# Altium PCB RTL8199FTV.PcbDoc
Units mil, origin at the board's own origin, x right, y up, seen from the top; angles counter-clockwise.
Board outline 1380.35 x 675 mil, 4 copper layers (Top Layer, GND, PWR, Bottom Layer), stack 23.756 mil thick; 26 components, 15 nets, 98 pads, 28 vias.
Unrouted connection lines stored in the file: 23.
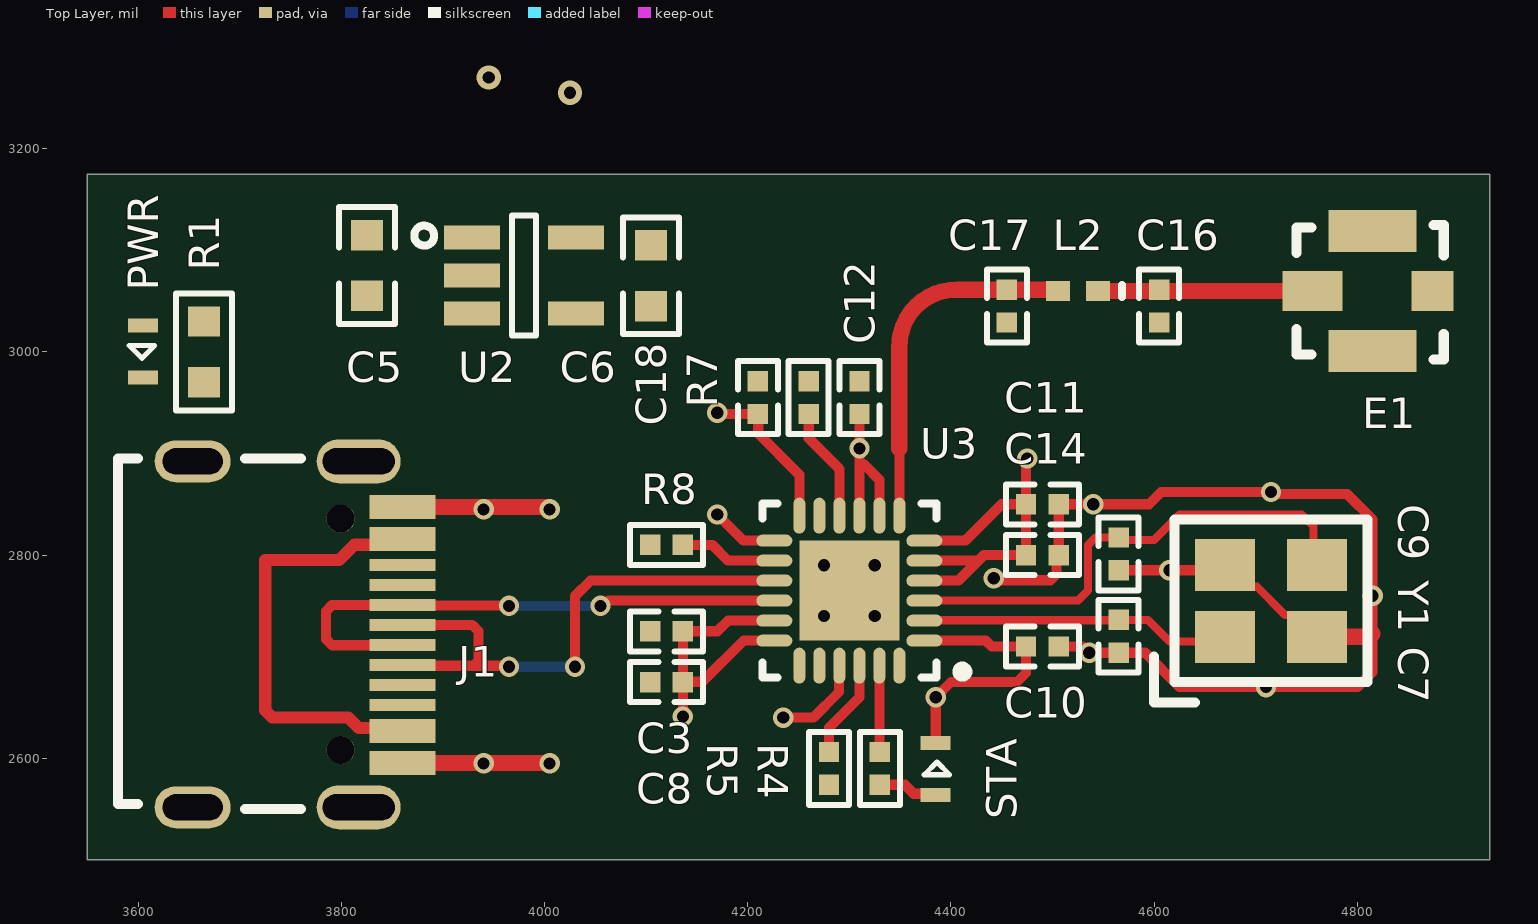
[diagram p0: Top Layer view]
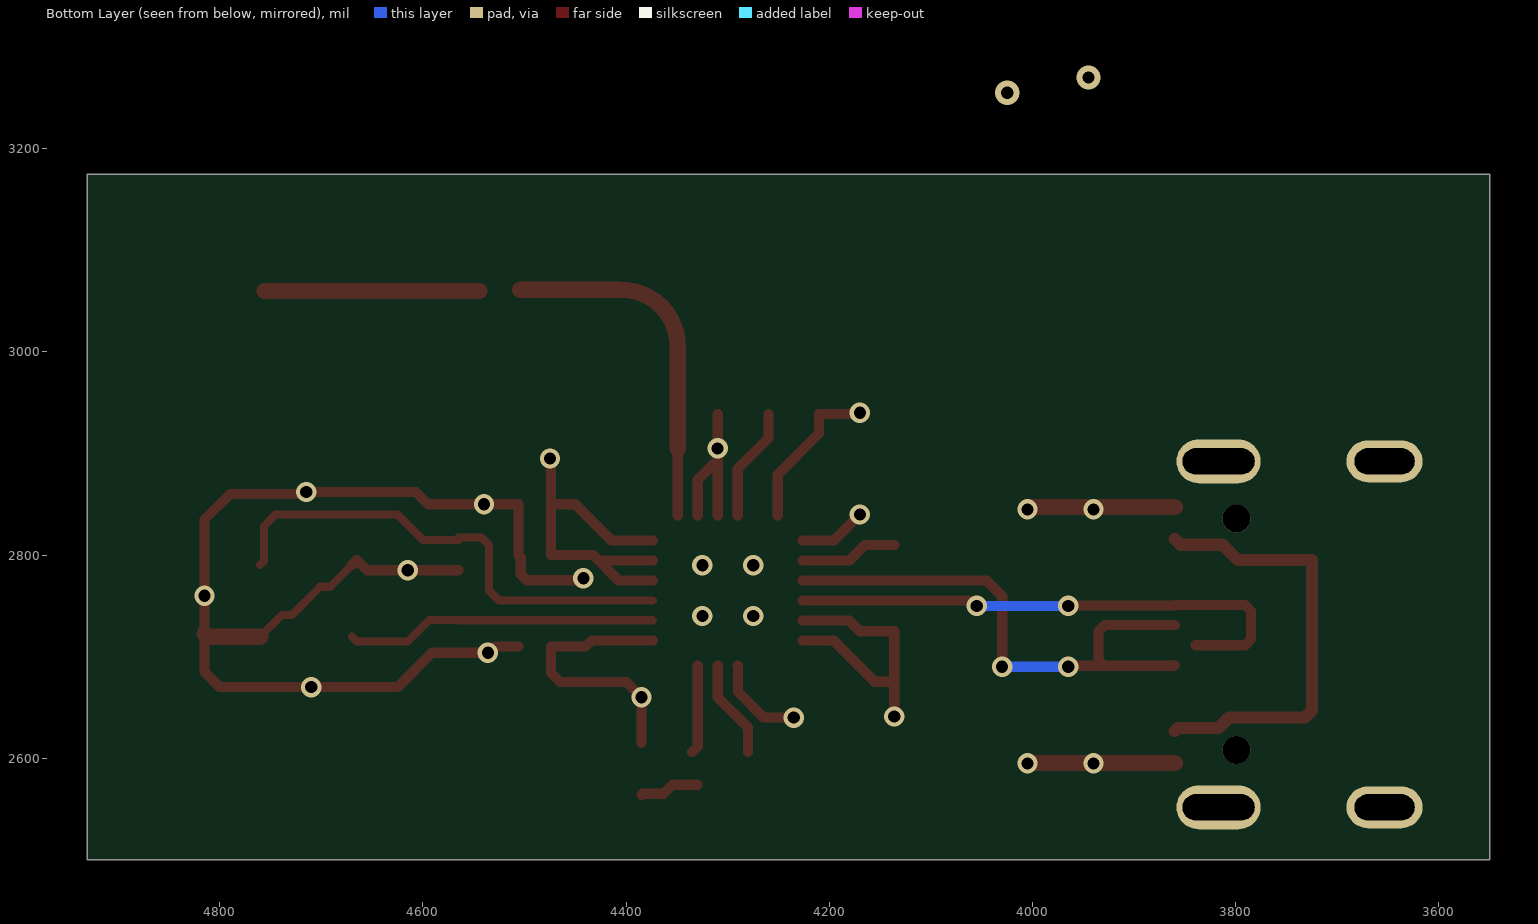
[diagram p1: Bottom Layer view, seen from below]
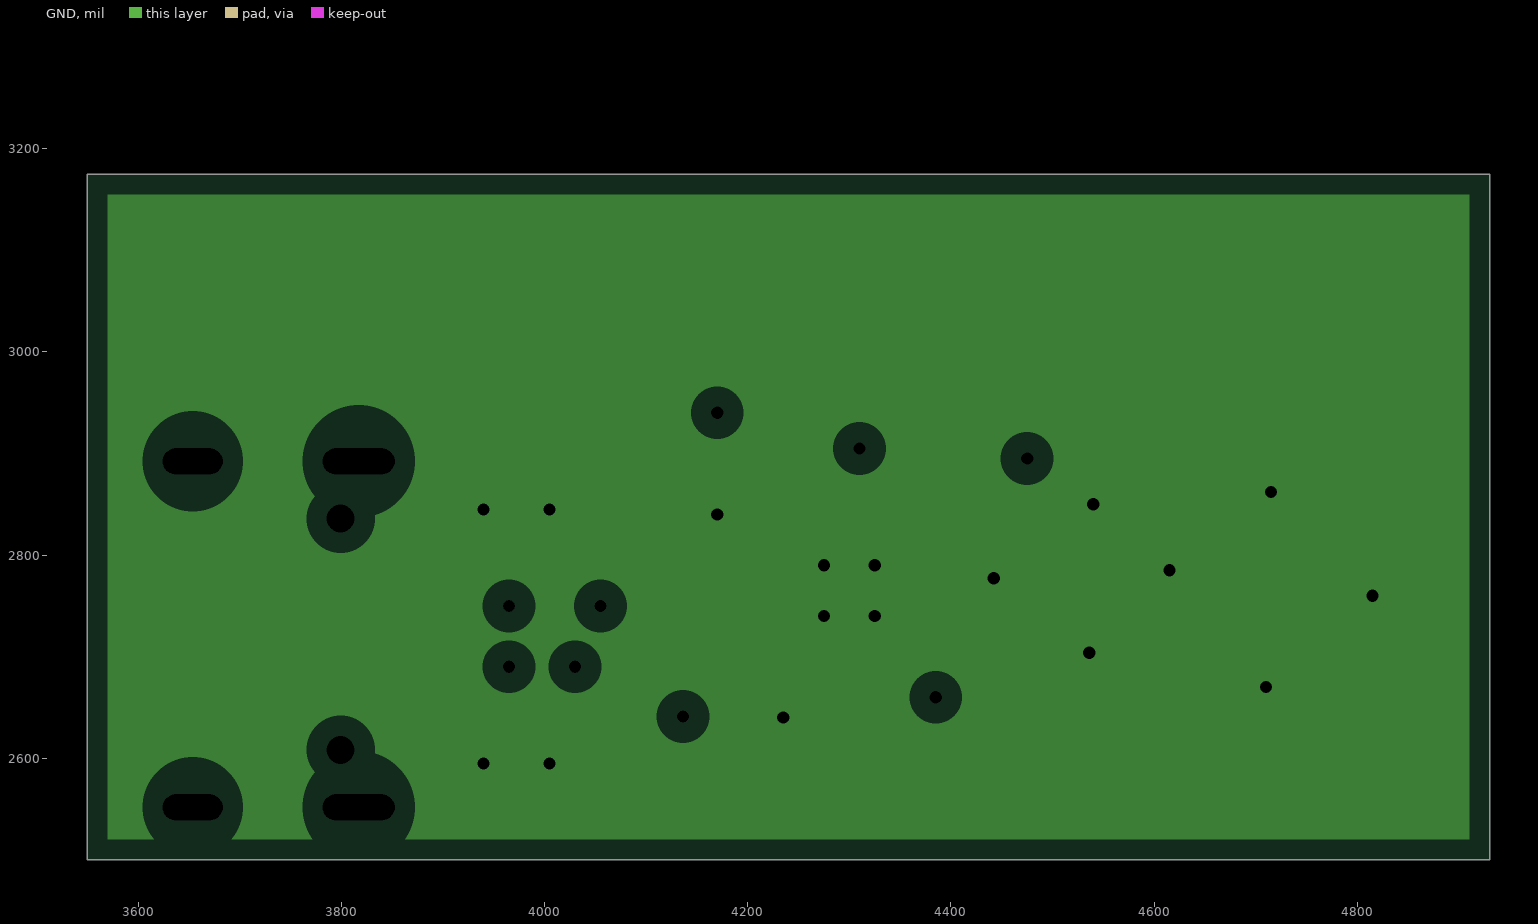
[diagram p2: GND, clearances drawn from the general rule]
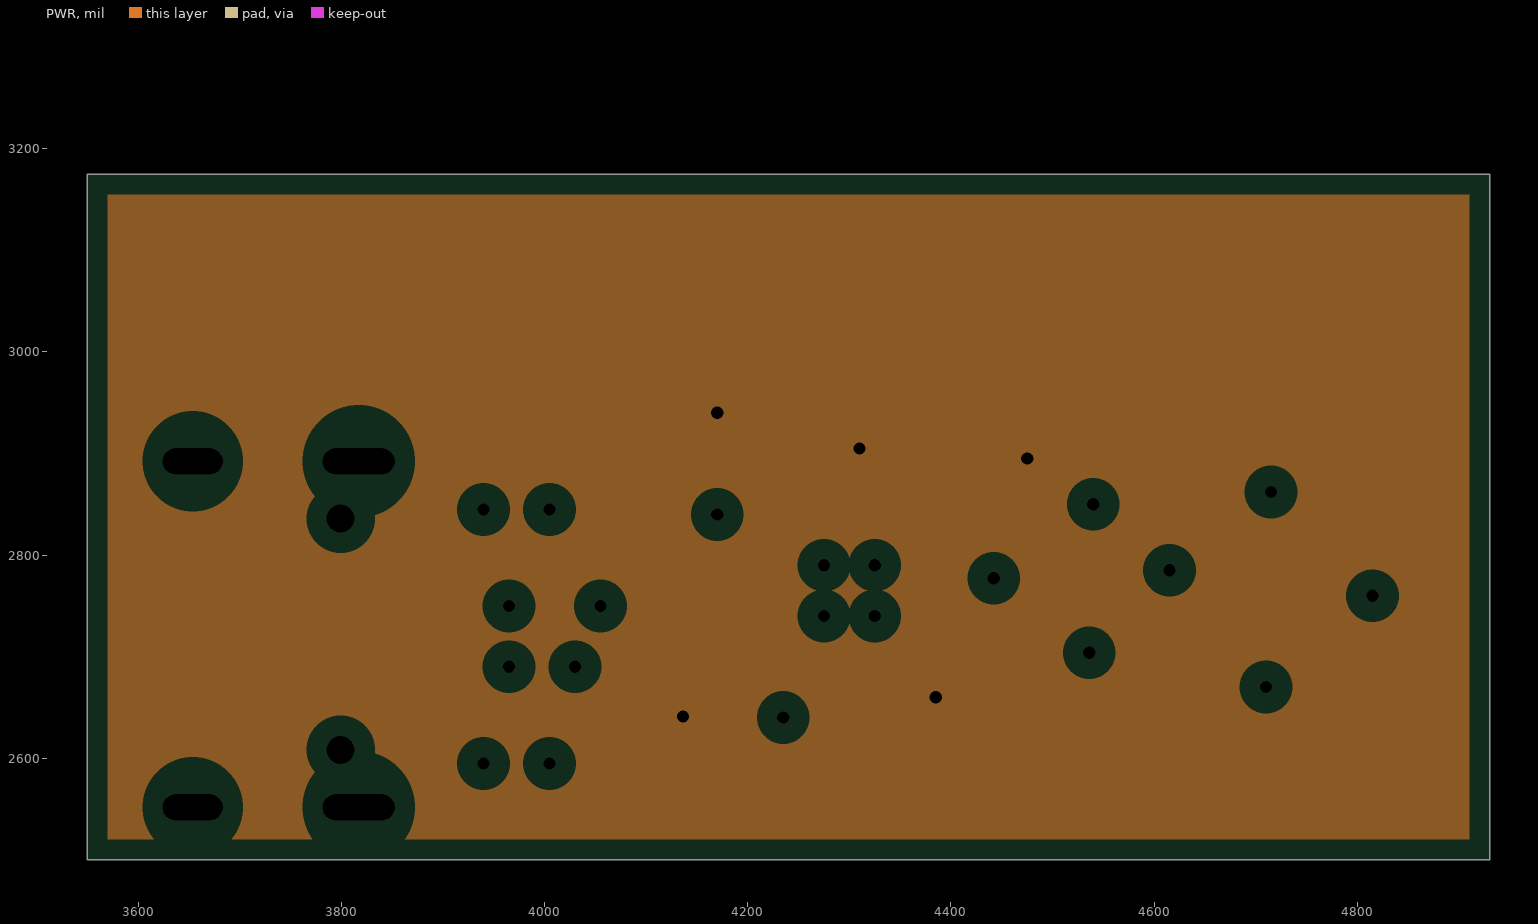
[diagram p3: PWR, clearances drawn from the general rule]
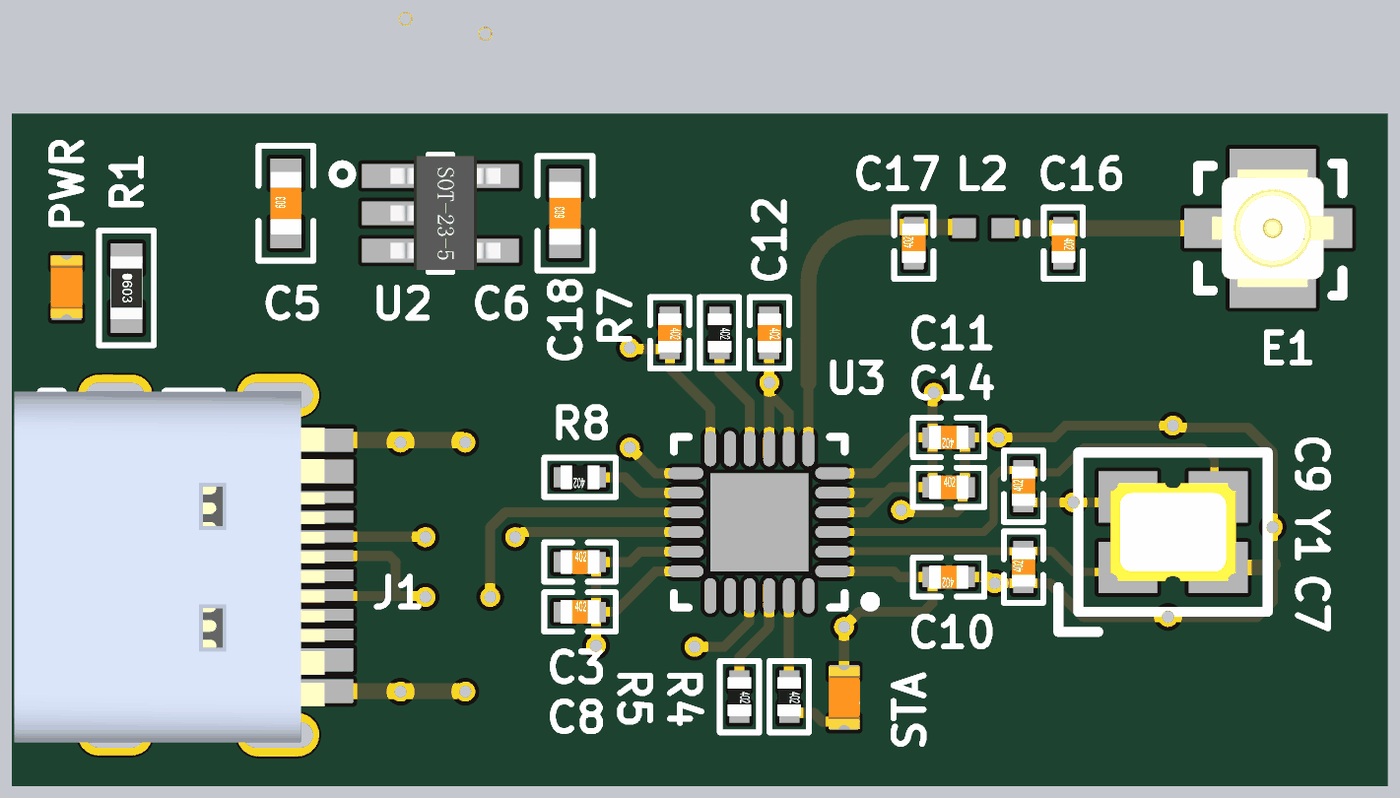
[diagram p4: 3D render of the assembled board from above, using the file's embedded part models]

## Layer stack, top to bottom
Top Solder: solder mask 0.4, Solder Resist, Dk 3.5
Top Layer: signal copper 1.4
Dielectric 2: prepreg 2.8, PP-006, Dk 4.1
GND: plane copper 1.378, net GND
Dielectric 1: dielectric 12.6, FR-4, Dk 4.8
PWR: plane copper 1.378, net VCC-3V3
Dielectric 3: prepreg 2.8, PP-006, Dk 4.1
Bottom Layer: signal copper 1.4
Bottom Solder: solder mask 0.4, Solder Resist, Dk 3.5

## Board outline
3550,2500 4930.35,2500 4930.35,3175 3550,3175

## Design rules (kind name [scope] priority, off if disabled: settings)
Clearance [All] p1: gap=10 ignorepadtopadclearanceinfootprint=TRUE except(0: Arc-Hole Track-Hole SMDPad-Hole THPad-Hole Via-Hole Fill-Hole Poly-Hole Region-Hole Text-Hole; 8: Arc-Arc Arc-Track Arc-SMDPad Arc-THPad Arc-Via Track-Track Track-SMDPad Track-THPad Track-Via SMDPad-SMDPad SMDPad-THPad SMDPad-Via THPad-THPad THPad-Via Via-Via)
PlaneClearance [All] p1: clearance=20
PlaneConnect [All] p1: planeconnectstyle=Relief reliefexpansion=20 reliefentries=4 reliefconductorwidth=10 reliefairgap=10
PolygonConnect [All] p1: connectstyle=Relief reliefconductorwidth=10 reliefentries=4 polygonreliefangle="90 Angle" airgapwidth=10
RoutingVias [All] p1: holewidth=12 width=20 viastyle="Through Hole" minholewidth=12 minwidth=18 maxholewidth=16 maxwidth=36
SolderMaskExpansion [All] p1: expansion=4 istentingtop=FALSE
Width Width_RF [InNetClass('RF')] p1: maxlimit=24 minlimit=10 preferedwidth=10 minimp=50.000000 maximp=50.000000 favimp=50.000000
Width Width_PWR [InNetClass('PWR')] p2: maxlimit=16 minlimit=8 preferedwidth=10 minimp=50.000000 maximp=50.000000 favimp=50.000000
Width [All] p3: maxlimit=10 minlimit=6 preferedwidth=8 minimp=50.000000 maximp=50.000000 favimp=50.000000
28 further rules are at their usual default settings.

## Classes and differential pairs
net class RF: NetC16_1 NetC17_2
net class PWR: GND VBUS VCC-3V3

## Components (designator, comment, footprint, x,y, rotation, side; value= is the part's Value field where it differs from the comment)
C3 "100nF(10%, 0402)" 0402C 4120,2725 r0 top value=100pF
C5 "2.2uF(10%, 0603)" 0603C 3825,3085 r90 top value=100pF
C6 "1uF(10%, 0603)" 0603C 4105,3075 r90 top value=100pF
C7 "15pF(10%, 0402)" 0402C 4565,2720 r90 top value=100pF
C8 "100nF(10%, 0402)" 0402C 4120,2675 r0 top value=100pF
C9 "15pF(10%, 0402)" 0402C 4565,2801.14 r90 top value=100pF
C10 "200nF(10%, 0402)" 0402C 4490,2710 r180 top value=100pF
C11 "100nF(10%, 0402)" 0402C 4490,2850 r180 top value=100pF
C12 "100nF(10%, 0402)" 0402C 4310,2955 r270 top value=100pF
C14 "100nF(1%, 0402)" 0402C 4490,2800 r0 top value=100pF
C16 "NC(1%, 0402)" 0402C 4605,3045 r270 top value=100pF
C17 "NC(1%, 0402)" 0402C 4455,3045 r90 top value=100pF
C18 "200nF(10%, 0402)" 0402C 4210,2955 r270 top value=100pF
E1 "Antenna" Antenna 4815,3060 r270 top
J1 "USB-TYPEC-16P" USB-TYPEC-16P 3760,2705 r270 top
L2 "NC(1%, 0402)" 0402-A 4525,3060 r180 top value=10mH
PWR "LED0" LED-0603 3595,3000 r180 top (schematic designator D2)
R1 "470R(1%, 0402)" 0603R 3665,3000 r90 top value=1K
R4 "470R(1%, 0402)" 0402R 4330,2590 r270 top value=1K
R5 "10K(1%, 0402)" 0402R 4280,2590 r270 top value=1K
R7 "10K(1%, 0402)" 0402R 4260,2955 r270 top value=1K
R8 "24K(1%, 0402)" 0402R 4120,2810 r180 top value=1K
STA "LED0" LED-0603 4395,2590 r0 top (schematic designator D1)
U2 "TLV702" SOT23-5 3980,3075 r270 top
U3 "RTL8188FTV" QFN-4X4-24-EA3059 4300,2765 r180 top
Y1 "40MHz" SMD3225-4P 4715,2755 r0 top

## Footprints (in the part's own frame and the unit in brackets; to place one, negate y for a bottom-side part, rotate by r counter-clockwise, add the part's x,y. Pads: shape width x height; smd on the part's side, far side on the other; paste and mask are expansions set on the pad)
0402-A [mm] "Chip Inductor, Body 1.0x0.5mm, IPC High Density"
  rect 0.6x0.5 smd: 1(-0.5,0) 2(0.5,0)
  silkscreen extent -1.1,-0.15 -1.1,0.15, body extent -0.55,-0.3 0.55,0.3, height 0.55
0402C [mm]
  rect 0.51x0.51 smd: 1(-0.41,0) 2(0.41,0)
  silkscreen extent -0.91,-0.5 0.91,0.5, body extent -0.5,-0.3 0.5,0.3, height 0.2
0402R [mm]
  rect 0.51x0.51 smd: 1(-0.41,0) 2(0.41,0)
  silkscreen extent -0.91,-0.5 0.91,0.5, body extent -0.5,-0.3 0.5,0.3, height 0.2
0603C [mm]
  rect 0.76x0.8 smd: 1(-0.76,0) 2(0.76,0)
  silkscreen extent -1.46,-0.7 1.46,0.7, body extent -0.8,-0.4 0.8,0.4, height 0.3
0603R [mm]
  rect 0.76x0.8 smd: 1(-0.76,0) 2(0.76,0)
  silkscreen extent -1.46,-0.7 1.46,0.7, body extent -0.8,-0.41 0.8,0.41, height 0.45
Antenna [mm] "XUNPU Antenna 2.0mm, SP-RF-001"
  rect 1x1.5 smd: 1(0,-1.5)
  rect 1.05x2.2 smd: 2(1.5,0) 4(-1.5,0)
  rect 1x1.05 smd: 3(0,1.5)
  silkscreen extent -1.65,-1.91 1.71,1.78, body extent -1.5,-1.55 1.5,1.55, height 1.25
LED-0603 [mm]
  rect 0.75x0.35 smd: 1(-0.254,0.635) 2(-0.254,-0.665)
  silkscreen extent -0.54,-0.16 0.1,0.16, body extent -0.65,-0.83 0.15,0.77, height 0.8
QFN-4X4-24-EA3059 [mm] "QFN, 24-Leads, Body 4.00x4.00mm, Pitch 0.50mm, Thermal Pad 2.50x2.50mm, IPC Medium Density"
  oval 0.9x0.3 smd: 1(-1.875,1.25) 2(-1.875,0.75) 3(-1.875,0.25) 4(-1.875,-0.25) 5(-1.875,-0.75) 6(-1.875,-1.25) 13(1.875,-1.25) 14(1.875,-0.75) 15(1.875,-0.25) 16(1.875,0.25) 17(1.875,0.75) 18(1.875,1.25)
  oval 0.3x0.9 smd: 7(-1.25,-1.875) 8(-0.75,-1.875) 9(-0.25,-1.875) 10(0.25,-1.875) 11(0.75,-1.875) 12(1.25,-1.875) 19(1.25,1.875) 20(0.75,1.875) 21(0.25,1.875) 22(-0.25,1.875) 23(-0.75,1.875) 24(-1.25,1.875)
  rect 2.5x2.5 smd: 25(0,0)
  silkscreen extent -2.95,-2.17 2.17,2.17, body extent -2.02,-2.02 2.02,2.02, height 1
SMD3225-4P [mm]
  rect 1.5x1.3 smd: GND(-1.15,0.9) GND(1.15,-0.9) OSC1(-1.15,-0.9) OSC2(1.15,0.9)
  silkscreen extent -2.92,-2.54 2.41,2.03, body extent -1.6,-1.25 1.6,1.25, height 1.05
SOT23-5 [mm]
  rect 0.6x1.4 smd: 1(-0.95,-1.3) 2(0,-1.3) 3(0.95,-1.3) 4(0.95,1.3) 5(-0.95,1.3)
  silkscreen extent -1.5,-2.75 1.5,0.3, body extent -1.45,-1.27 1.45,1.53, height 1.2
USB-TYPEC-16P [mm]
  oval 1.1x2.1 hole 0.65 slot 1.8 at 90 deg mask+0.051: 13(-4.757,1.448) 15(3.893,1.448)
  oval 1.05x1.9 hole 0.65 slot 1.5 at 90 deg mask+0.051: 14(-4.757,-2.702) 16(3.893,-2.702)
  round 0.7 hole 0.7 unplated mask+0.102: 22(-3.322,0.998) 23(2.458,0.998)
  rect 0.6x1.651 smd: A1B12(-3.617,2.54) A4B9(-2.817,2.54) A9B4(1.983,2.54) A12B1(2.783,2.54)
  rect 0.3x1.651 smd: A5(-1.667,2.54) A6(-0.667,2.54) A7(-0.167,2.54) A8(0.833,2.54) B5(1.333,2.54) B6(0.333,2.54) B7(-1.167,2.54) B8(-2.167,2.54)
  silkscreen extent -4.83,-4.57 3.94,0, body extent -4.85,-5.27 4.09,2.63, height 3.26

## Part data
C3 C5 C6 C7 C8 C9 C10 C11 C12 C14 C16 C17 C18: library part Cap, "Capacitor", LatestRevisionDate=17-Jul-2002, LatestRevisionNote="Re-released for DXP Platform.", PackageDescription="Radial Cap, Thru-Hole; 2 Leads; 0.3 in Pin Spacing", PackageReference=RAD-0.3, Published=8-Jun-2000, Publisher="Altium Limited"
E1: "Generic Antenna", LatestRevisionDate=17-Jul-2002, LatestRevisionNote="Re-released for DXP Platform.", PackageReference=PIN1, Published=24-Mar-1999, Publisher="Altium Limited"
L2: library part Inductor, "Inductor", Code_IEC=1005, Code_JEITA=0402, LatestRevisionDate=29-May-2009, LatestRevisionNote="IPC-7351 Footprint Added.", PackageDescription="Chip Inductor", PackageReference=0402-A, Published=8-Jun-2000, Publisher="Altium Limited"
PWR STA: "Typical INFRARED GaAs LED", LatestRevisionDate=08-Jul-2005, LatestRevisionNote="Mech Layer 1 removed.", PackageDescription="LED; 2 Leads", PackageReference=LED-0, Published=8-Jun-2000, Publisher="Altium Limited"
R1 R4 R5 R7 R8: library part Res1, "Resistor", LatestRevisionDate=17-Jul-2002, LatestRevisionNote="Re-released for DXP Platform.", PackageDescription="Axial Device, Thru-Hole; 2 Leads; 0.3 in Pin Spacing", PackageReference=AXIAL-0.3, Published=8-Jun-2000, Publisher="Altium Limited"
U2: "TI LDO chip, max output current: 300mA, drapout=220mV"
Y1: library part XTAL, "Crystal Oscillator", LatestRevisionDate=17-Jul-2002, LatestRevisionNote="Re-released for DXP Platform.", PackageDescription="Crystal, Thru-Hole; 2 Leads; Body 3.1 x 8.2 mm (Dia.xH)", PackageReference=R38, Published=8-Jun-2000, Publisher="Altium Limited"

## Via types
v1: diameter 20, hole 12, Top Layer to Bottom Layer, 26 vias
v2: diameter 24, hole 12, Top Layer to Bottom Layer, 2 vias

## Nets (pads, with @x,y where several pads share a name; then routed paths per layer and width w, separated by ;. In a path a pad name is that pad's centre, name@x,y a point inside that pad or via, vN(x,y) a via of type N, cw(c..) or ccw(c..) an arc to the next point about the centre after c; other vN are vias at no path point)
GND: C3.1 C5.1 C6.1 C7.1 C8.1 C9.1 C10.1 C11.1 C12.1 C14.2 C16.2 C17.1 C18.1 J1.A1B12 J1.A12B1 R1.1 R5.2 R8.2 U2.2 U2.4 U3.13 U3.21 U3.25 Y1.GND | length 1676.5
  Top Layer w8: Y1.GND@4669.72,2790.43 4691.31,2768.84 4701.16,2768.84 4728.84,2741.16 4738.69,2741.16 Y1.GND@4760.28,2719.57
  Top Layer w10: v1(4170,2840) 4195.79,2814.21 U3.13 ; v1(4235,2640) 4264.54,2640 4289.81,2665.27 4289.81,2690.83 U3.21 ; v1(4442.16,2777.16) 4444.07,2775.24 4497.89,2775.24 4503.75,2781.1 4503.75,2797.61 C14.2 C11.1 4595,2850 4607,2862 v1(4715,2862) ; C10.1 4530,2710 v1(4536.14,2703.86) C7.1 4591.14,2703.86 4625,2670 v1(4710,2670) 4800,2670 4815,2685 4815,2722.5 v1(4815,2760) 4815,2835 4790,2860 v1@4715,2860 ; C9.1 v1(4615,2785) 4655.16,2785 4665.16,2795 Y1.GND@4669.72,2790.43
  Top Layer w16: J1.A12B1 4004.57,2595.43 v1(4005,2595) ; J1.A1B12 4002.6,2847.4 v1(4005,2845) ; Y1.GND@4760.28,2719.57 4812.07,2719.57 4815,2722.5
  other v1: 3940,2595 4275,2740 4325,2740 4275,2790 4325,2790 3940,2845 4540,2850
NetC16_1: C16.1 E1.1 L2.1 | length 212.2
  Top Layer w10: C16.1@4603.86,3060 C16.1 C16.1@4606.14,3060
  Top Layer w16: L2.1 C16.1@4603.86,3060 ; C16.1@4606.14,3060 E1.1
NetC17_2: C17.2 L2.2 U3.7 | length 355
  Top Layer w10: U3.7 4349.21,2905 ; 4406.5,3061.14 ccw(c4406.68,3071.14) 4406.6,3061.14 ; L2.2@4504.17,3061.14 L2.2
  Top Layer w16: 4349.21,2905 4349.21,3003.88 cw(c4405.04,3005.31) 4406.5,3061.14 ; 4406.6,3061.14 C17.2 L2.2@4504.17,3061.14
NetD1_2: R4.2 STA.2 | length 59.2
  Top Layer w10: R4.2 4354.49,2573.86 4363.33,2565.02 4383.8,2565.02 STA.2
NetD2_2: PWR.2 R1.2
NetR4_1: R4.1 U3.23 | length 87.3
  Top Layer w10: U3.23 4329.53,2611.61 R4.1@4335,2606.14
NetR5_1: R5.1 U3.22 | length 97.4
  Top Layer w10: R5.1 4280,2630 4309.84,2659.84 U3.22
NetR7_2: R7.2 U3.10 | length 112.5
  Top Layer w10: R7.2 4260,2915 4290.16,2884.84 U3.10
NetR8_1: R8.1 U3.14 | length 96.4
  Top Layer w10: R8.1 4165,2810 4180.47,2794.53 U3.14
USB-DM: J1.A7 J1.B7 U3.16 | length 531.1
  Top Layer w10: J1.A7@3839.58,2711.22 3790.86,2711.22 3785,2717.08 3785,2745 3790.95,2750.95 J1.B7 3860.47,2750.47 3964.53,2750.47 v1(3965,2750) ; v1(4055,2750) 4057.71,2750 4062.86,2755.16 U3.16
  Bottom Layer w10: v1(3965,2750) v1(4055,2750)
USB-DP: J1.A6 J1.B6 U3.15 | length 556.4
  Top Layer w10: J1.B6 3860.78,2691.11 3930,2691.11 ; J1.A6 3928.74,2731.26 3935,2725 3935,2696.11 3930,2691.11 ; v1(3965,2690) 3963.89,2691.11 3930,2691.11 ; v1@4029.84,2690.16 4029.84,2759.53 4045.16,2774.84 U3.15
  Bottom Layer w10: v1(3965,2690) v1(4030,2690)
VBUS: C5.2 J1.A4B9 J1.A9B4 U2.1 U2.3 | length 435
  Top Layer w12: J1.A9B4 3857.19,2629.74 3817.05,2629.74 3806.79,2640 3732.03,2640 3725,2647.03 3725,2795 3797.79,2795 3813.01,2810.22 3854.31,2810.22 J1.A4B9
VCC-3V3: C3.2 C6.2 C8.2 C10.2 C11.2 C12.2 C14.1 C18.2 PWR.1 R7.1 STA.1 U2.5 U3.1 U3.4 U3.5 U3.6 U3.8 U3.9 U3.12 U3.17 U3.18 | length 1251.7
  Top Layer w10: v1@4135,2640 v1(4136.14,2641.14) C8.2 ; v1(4170,2940) 4171.14,2938.86 C18.2 4210.32,2938.54 4210.32,2919.68 4250.79,2879.21 U3.12 ; U3.18 4195.79,2715.79 4155.32,2675.32 4136.46,2675.32 C8.2 ; U3.17 4180.47,2735.47 4170,2725 C3.2 C8.2 ; U3.9 4309.92,2838.9 4309.92,2888.84 ; C12.2 4309.92,2938.78 4309.92,2888.84 ; U3.8 4329.53,2874.14 4314.83,2888.84 4309.92,2888.84 ; U3.1 4434.21,2715.79 4440,2710 C10.2 4473.86,2683.86 4465,2675 4400,2675 v1(4385,2660) STA.1 ; U3.4 4407.32,2774.84 4432.63,2800.16 4473.7,2800.16 C14.1 C11.2 ; U3.5 4427,2794.53 ; U3.6 4414.21,2814.21 4450,2850 C11.2 ; v1(4475,2895) 4473.86,2893.86 C11.2
  other v1: 4310,2905
  other v2: 4025,3255 3945,3270
XTAL1: C7.2 U3.2 Y1.OSC1 | length 306.8
  Top Layer w8: U3.2 4374.15,2735.81 4564.67,2735.81 C7.2 4593.86,2736.14 4615,2715 4665.16,2715 Y1.OSC1
XTAL2: C9.2 U3.3 Y1.OSC2 | length 489.5
  Top Layer w8: U3.3 4525.16,2755.16 4535,2765 4535,2810 4542.28,2817.28 C9.2 ; C9.2@4565,2815 4600,2815 4625,2840 4745,2840 4756.66,2828.34 4756.66,2794.05 Y1.OSC2
pads on no net: E1.2 E1.3 E1.4 J1.13 J1.14 J1.15 J1.16 J1.22 J1.23 J1.A5 J1.A8 J1.B5 J1.B8 U3.11 U3.19 U3.20 U3.24

## Polygon pours and split planes (outlines as drawn)
GND on GND (split plane): 4910.26,2520.1 3570.1,2520.1 3570.1,3154.9 4910.26,3154.9
VCC-3V3 on PWR (split plane): 4910.26,2520.1 3570.1,2520.1 3570.1,3154.9 4910.26,3154.9

## Silkscreen, mask and mechanical layers (free items; w line width, h text height)
Mechanical 1:
  lines w10: 3550,2500 4765,2500 4930.35,2500 4930.35,3175 3550,3175 3550,2500